# Allegro board GPS_INTERFACE_BOARDv2.brd
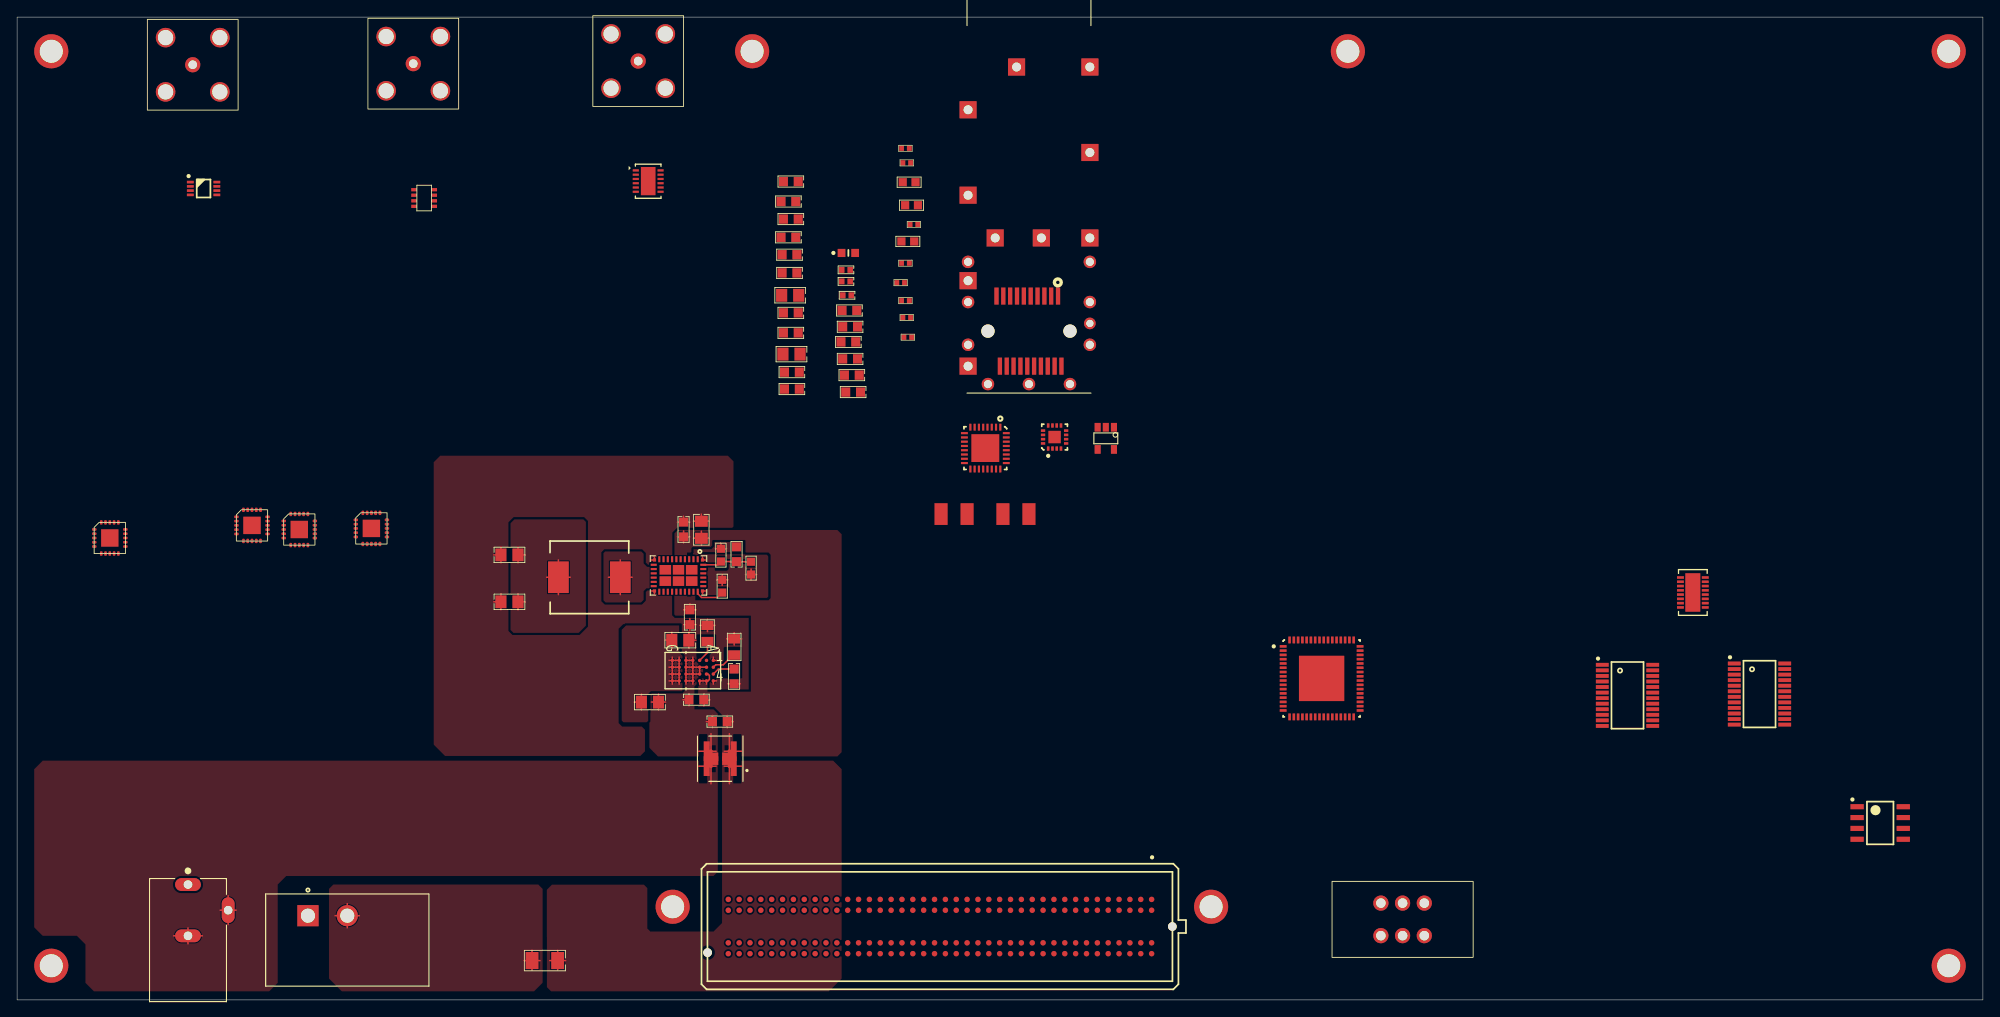
[diagram p0: board, top side]
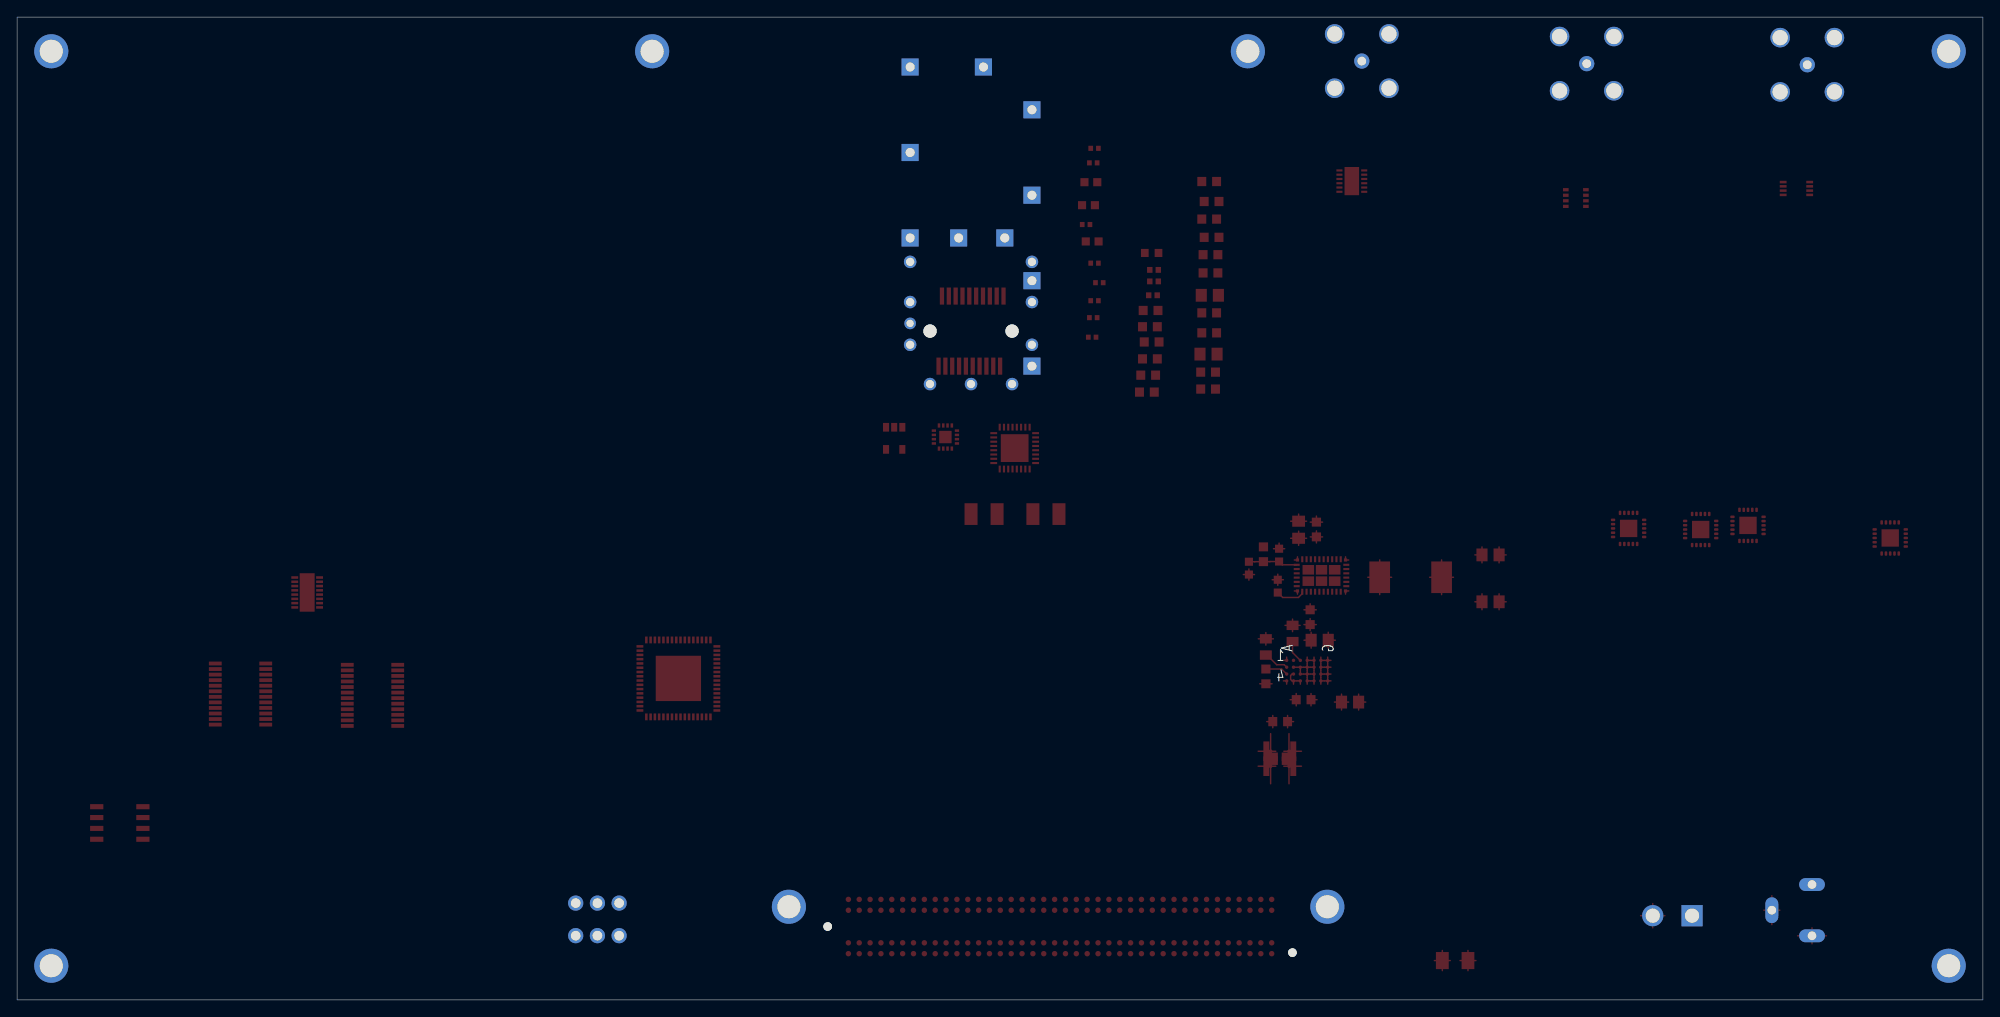
[diagram p1: board, bottom side, seen from below]

Outline 230 x 115 mm; copper layers: TOP, L2, L3, L4, L5, BOTTOM. Coordinates in mm from the lower left corner of the outline.
Outline path: 0,115 230,115 230,0 0,0 0,115

## Design rules (mm)
constraint set DEFAULT: min track width 0.17, pair gap 0.3
net group CLK_TO_SFP[0..11]: nets CLK_TO_SFP.CLK_TO_SFP_N0 CLK_TO_SFP.CLK_TO_SFP_N1 CLK_TO_SFP.CLK_TO_SFP_N2 CLK_TO_SFP.CLK_TO_SFP_N3 CLK_TO_SFP.CLK_TO_SFP_N4 CLK_TO_SFP.CLK_TO_SFP_N5 CLK_TO_SFP.CLK_TO_SFP_P0 CLK_TO_SFP.CLK_TO_SFP_P1 CLK_TO_SFP.CLK_TO_SFP_P2 CLK_TO_SFP.CLK_TO_SFP_P3 CLK_TO_SFP.CLK_TO_SFP_P4 CLK_TO_SFP.CLK_TO_SFP_P5
net group FMC[0..60]: nets FMC.CLK_FILTER_A FMC.CLK_FILTER_B FMC.CLK_GEN_INTR* FMC.CLK_GEN_LOL FMC.CLK_GEN_LOL_N FMC.CLK_GEN_RST* FMC.CLK_TO_FPGA_N FMC.CLK_TO_FPGA_P FMC.DATA_TO_FF_N0 FMC.DATA_TO_FF_N1 FMC.DATA_TO_FF_N2 FMC.DATA_TO_FF_N3 FMC.DATA_TO_FF_N4 FMC.DATA_TO_FF_N5 FMC.DATA_TO_FF_P0 FMC.DATA_TO_FF_P1 FMC.DATA_TO_FF_P2 FMC.DATA_TO_FF_P3 FMC.DATA_TO_FF_P4 FMC.DATA_TO_FF_P5 FMC.GPS_CLK_EN* FMC.GPS_IRIGB FMC.GPS_PPS_N FMC.GPS_PPS_P FMC.I2C_BUS_INT0* FMC.I2C_BUS_INT1* FMC.I2C_BUS_RST* FMC.OSC_EN FMC.PWR_GOOD FMC.RECOV_CLK_N0 FMC.RECOV_CLK_N1 FMC.RECOV_CLK_N2 FMC.RECOV_CLK_N3 FMC.RECOV_CLK_N4 FMC.RECOV_CLK_N5 FMC.RECOV_CLK_P0 FMC.RECOV_CLK_P1 FMC.RECOV_CLK_P2 FMC.RECOV_CLK_P3 FMC.RECOV_CLK_P4 FMC.RECOV_CLK_P5 FMC.RECOV_DATA_N0 FMC.RECOV_DATA_N1 FMC.RECOV_DATA_N2 FMC.RECOV_DATA_N3 FMC.RECOV_DATA_N4 FMC.RECOV_DATA_N5 FMC.RECOV_DATA_P0 FMC.RECOV_DATA_P1 FMC.RECOV_DATA_P2 FMC.RECOV_DATA_P3 FMC.RECOV_DATA_P4 FMC.RECOV_DATA_P5 FMC.SCL FMC.SDA FMC.SFP_TX_DISABLE0 FMC.SFP_TX_DISABLE1 FMC.SFP_TX_DISABLE2 FMC.SFP_TX_DISABLE3 FMC.SFP_TX_DISABLE4 FMC.SFP_TX_DISABLE5
net group GPS_GROUP[0..4]: nets GPS_GROUP.GPS_CLK_N GPS_GROUP.GPS_CLK_P GPS_GROUP.GPS_IRIGB GPS_GROUP.GPS_PPS_N GPS_GROUP.GPS_PPS_P
net group VM1: nets GND_SIGNAL

## Placement (name value [footprint] x y rotation side)
C44  0.1UF  [CAP0603]  83.89 37.85 90 top
C46  1UF  [CAP0603]  82.22 32.56 180 top
C47  1UF  [CAP0603]  79.48 35.13 180 top
C48  22UF  [CAP0805]  77.6 42.09 0 top
C49  0.1UF  [CAP0805]  74.04 34.85 0 top
C50  10UF  [CAP0805]  80.06 55.02 90 top
C51  0.47UF  [CAP0603]  78.71 44.78 270 top
C52  0.47UF  [CAP0603]  77.98 55.04 90 top
C53  47UF  [CAP0805]  57.61 52.07 180 top
C54  47UF  [CAP0805]  57.61 46.58 180 top
C55  5.0PF  [CAP0603]  84.18 52.15 270 top
C101  0.1UF  [CAP0603]  90.65 71.48 0 top
C102  0.1UF  [CAP0603]  90.65 73.46 0 top
C103  22UF  [CAP0805]  90.6 75.56 0 top
C104  0.1UF  [CAP0603]  90.53 78.05 0 top
C105  0.1UF  [CAP0603]  90.53 80.39 0 top
C106  22UF  [CAP0805]  90.45 82.45 0 top
C107  0.1UF  [CAP0603]  90.37 85.06 0 top
C108  1000PF  [CAP0603]  90.37 87.2 0 top
C109  0.1UF  [CAP0603]  90.25 89.23 0 top
C110  0.1UF  [CAP0603]  90.53 91.36 0 top
C111  0.1UF  [CAP0603]  90.25 93.42 0 top
C112  0.1UF  [CAP0603]  90.53 95.76 0 top
C113  0.1UF  [CAP0603]  97.82 71.12 0 top
C114  1000PF  [CAP0603]  97.66 73.1 0 top
C115  1000PF  [CAP0603]  97.46 75.01 0 top
C116  1000PF  [CAP0603]  97.26 76.99 0 top
C117  1000PF  [CAP0603]  97.46 78.77 0 top
C118  1000PF  [CAP0603]  97.38 80.67 0 top
C119  0.47UF  [CAP0402]  97.1 82.45 0 top
C120  0.1UF  [CAP0402]  96.98 84.07 0 top
C121  0.1UF  [CAP0402]  96.98 85.42 0 top
D6  RED  [LEDC1608X80N]  97.26 87.4 0 top
F1  4A  [CAP1206]  61.75 4.6 0 top
FL1  120 Ohm@100MHz  [FIL_DLW5BTM501SQ2L]  82.26 28.22 270 top
IC1  SN74AVC2T45DCTR  [SOP50P310X90-8N]  21.82 94.95 0 top
IC2  SI5395A-A-GM  [QFN50P900X900X90-65N-S530]  152.63 37.62 0 top
IC3  24AA025E48T-I/OT  [SOIC127P600X175-8N]  217.98 20.7 0 top
IC4  PCA9539PW,118  [SOP65P640X110-24N]  203.86 35.79 0 top
IC5  PCA9539PW,118  [SOP65P640X110-24N]  188.42 35.64 0 top
J1  BNC/R  [BNC_RA_03161221]  72.67 109.86 0 top
J2  BNC/R  [BNC_RA_03161221]  46.35 109.55 0 top
J3  BNC/R  [BNC_RA_03161221]  20.55 109.42 0 top
J4  AXS-7050-06-13  [OSC_6P_7_5_1-6]  162.1 9.42 0 top
J5  PJ-102AH  [CUI_PJ-102AH]  19.99 7 270 top
J6  ASP-134606-01  [SAMTEC_ASP-134606-01]  107.98 8.59 0 top
J7  1367073-1  [TE_2227023-1]  118.39 78.26 270 top
L7  3.3 uH  [WE-LHMI_8040]  66.95 49.45 180 top
L8  4.7 uH  [CAP1210]  116.87 56.85 0 top
L9  4.7 uH  [CAP1210]  109.63 56.85 0 top
NOREF  -  [unnamed]  155.7 111 0 top
NOREF#2  -  [unnamed]  226 111 0 top
NOREF#3  -  [unnamed]  139.7 10.9 0 top
NOREF#4  -  [unnamed]  86 111 0 top
NOREF#5  -  [unnamed]  4 111 0 top
NOREF#6  -  [unnamed]  226 4 0 top
NOREF#7  -  [unnamed]  76.7 10.9 0 top
NOREF#8  -  [unnamed]  4 4 0 top
R29  33.2 kOhm  [RES0805]  80.77 42.88 270 top
R30  45.3k  [RES0805]  83.9 41.3 90 top
R31  1M  [RES0603]  82.35 52.04 270 top
R32  17.8k  [RES0603]  82.5 48.41 90 top
R33  383k  [RES0603]  85.88 50.52 270 top
R66  49.9  [RES0402]  104.22 77.55 0 top
R67  49.9  [RES0402]  104.09 79.83 0 top
R68  4.7k  [RES0402]  103.94 81.81 0 top
R69  4.7k  [RES0402]  103.38 83.92 0 top
R70  4.7k  [RES0402]  103.94 86.21 0 top
R71  4.99K  [RES0603]  104.22 88.75 0 top
R72  4.7k  [RES0402]  104.93 90.73 0 top
R73  4.99K  [RES0603]  104.65 92.99 0 top
R74  200  [RES0603]  104.37 95.68 0 top
R75  0  [RES0402]  104.09 97.94 0 top
R76  0  [RES0402]  103.94 99.64 0 top
S1  L101011MS02Q  [SW_L101011MS02Q]  38.63 7.01 0 top
U1  LTC6957IDD-2#PBF  [DFN_12]  73.84 95.81 0 top
U2  MAX9371EKA+  [SOT-23-8]  47.62 93.83 0 top
U4  LTM8063EY#PBF  [BGA28]  79.06 38.53 270 top
U5  LT8645SJV-2  [CONV_T8645SIV]  77.38 49.66 270 top
U6  TPS7A8400RGRT  [QFN20_3P65MMSQ]  10.85 54.05 0 top
U8  TPS7A8400RGRT  [QFN20_3P65MMSQ]  41.45 55.17 0 top
U10  TPS7A8400RGRT  [QFN20_3P65MMSQ]  33.02 55.04 0 top
U11  TPS7A8400RGRT  [QFN20_3P65MMSQ]  27.48 55.52 0 top
U16  NB7V52MMNG  [PQFN50P300X300X100-17N-S145]  121.39 65.86 90 top
U17  ADN2814ACPZ  [QFN50P500X500X100-33N-S325]  113.28 64.57 270 top
U18  SN74LVC1G32  [SOT23-5]  127.38 65.71 270 top
U34  LTC4317CDHC#PBF  [DFN-16_DHC]  196.06 47.68 0 top

## Library data of the parts
C44 C46-C55 = CAP_NP: Tolerance: TOL?; User Part Number: PN?
C101-C121 = CAP_NP: Tolerance: TOL?; User Part Number: PN?; room: SFP1
D6 = LED: room: SFP1
F1 = FUSE: Tolerance: TOL?; User Part Number: PN?
FL1 = 490-11112-1-ND
IC1 = 74AVC2T45_DCT_0
IC2 = SI5395_QFN_1
IC3 = 24AA025E48_SOIC_0
IC4 IC5 = PCA9539_TSSOP_0
J1-J3 = BNCR_3
J4 = OSC_SOCKET_3
J5 = PJ-102AH
J6 = CON160P_10
J7 = CON20P_SFP-1367073-1_1: room: SFP1
L7 = IND
L8 L9 = IND: room: SFP1
R29-R33 = R: Tolerance: TOL?; User Part Number: PN?
R66-R76 = R: Tolerance: TOL?; User Part Number: PN?; room: SFP1
S1 = L101011MS02Q
U1 = LTC6957-2_3
U2 = MAX9371_2
U4 = LTM8063_0: User Part Number: PN; Tolerance: TOL
U5 = LT8645
U6 U8 U10 U11 = TPS7A8400
U16 = NB7V52M_2: room: SFP1
U17 = ADN2814ACPZ_1: room: SFP1
U18 = SN74LVC1G32_4: room: SFP1
U34 = LTC4317CDHC_0: User Part Number: PN; Tolerance: TOL

## Footprints (pads in the part's own frame, mm; a bottom-side part is the same pattern mirrored in y, then rotated)
BGA28
  round 0.4 smd: A1(-1.2,2.4) A2(-0.4,2.4) A3(0.4,2.4) A4(1.2,2.4) B1(-1.2,1.6) B2(-0.4,1.6) B3(0.4,1.6) B4(1.2,1.6) C1(-1.2,0.8) C2(-0.4,0.8) C3(0.4,0.8) C4(1.2,0.8) D1(-1.2,0) D2(-0.4,0) D3(0.4,0) D4(1.2,0) E1(-1.2,-0.8) E2(-0.4,-0.8) E3(0.4,-0.8) E4(1.2,-0.8) F1(-1.2,-1.6) F2(-0.4,-1.6) F3(0.4,-1.6) F4(1.2,-1.6) G1(-1.2,-2.4) G2(-0.4,-2.4) G3(0.4,-2.4) G4(1.2,-2.4)
BNC_RA_03161221
  round 1.778 hole 1.016: 1(0,0)
  round 2.286 hole 1.778: 2(3.175,3.175) 3(3.175,-3.175) 4(-3.175,-3.175) 5(-3.175,3.175)
CAP0402
  rect 0.635x0.686 smd: 1(-0.499,0) 2(0.499,0)
CAP0603
  rect 1.05x1.08 smd: 1(-0.865,0) 2(0.865,0)
CAP0805
  rect 1.3x1.5 smd: 1(-1,0) 2(1,0)
CAP1206
  rect 1.5x2 smd: 1(-1.5,0) 2(1.5,0)
CAP1210
  rect 1.524x2.54 smd: 1(-1.524,0) 2(1.524,0)
CONV_T8645SIV
  rect 0.7x0.25 smd: 1(-1.9,2.25) 2(-1.9,1.75) 3(-1.9,1.25) 4(-1.9,0.75) 5(-1.9,0.25) 6(-1.9,-0.25) 7(-1.9,-0.75) 8(-1.9,-1.25) 9(-1.9,-1.75) 10(-1.9,-2.25) 17(1.9,-2.25) 18(1.9,-1.75) 19(1.9,-1.25) 20(1.9,-0.75) 21(1.9,-0.25) 22(1.9,0.25) 23(1.9,0.75) 24(1.9,1.25) 25(1.9,1.75) 26(1.9,2.25)
  rect 0.25x0.7 smd: 11(-1.25,-2.9) 12(-0.75,-2.9) 13(-0.25,-2.9) 14(0.25,-2.9) 15(0.75,-2.9) 16(1.25,-2.9) 27(1.25,2.9) 28(0.75,2.9) 29(0.25,2.9) 30(-0.25,2.9) 31(-0.75,2.9) 32(-1.25,2.9)
  rect 1.125x1.355 smd: 33(-0.662,1.543) 34(0.662,1.543) 37(-0.662,-1.543) 38(0.662,-1.543)
  rect 1.125x1.33 smd: 35(-0.662,0) 36(0.662,0)
  rect 0.375x0.375 smd: 39(-1.813,2.813) 40(-1.813,-2.813) 41(1.813,-2.813) 42(1.813,2.813)
CUI_PJ-102AH
  oval 1.508x3.016 hole 1: 1(-6.5,0) 2(-0.5,0)
  oval 3.016x1.508 hole 1: 3(-3.5,4.7)
DFN-16_DHC
  rect 0.805x0.3 smd: 1(-1.452,1.75) 2(-1.452,1.25) 3(-1.452,0.75) 4(-1.452,0.25) 5(-1.452,-0.25) 6(-1.452,-0.75) 7(-1.452,-1.25) 8(-1.452,-1.75) 9(1.452,-1.75) 10(1.452,-1.25) 11(1.452,-0.75) 12(1.452,-0.25) 13(1.452,0.25) 14(1.452,0.75) 15(1.452,1.25) 16(1.452,1.75)
  rect 1.75x4.5 smd: 17(0,0)
DFN_12
  rect 0.711x0.254 smd: 1(-1.45,1.25) 2(-1.45,0.75) 3(-1.45,0.25) 4(-1.45,-0.25) 5(-1.45,-0.75) 6(-1.45,-1.25) 7(1.45,-1.25) 8(1.45,-0.75) 9(1.45,-0.25) 10(1.45,0.25) 11(1.45,0.75) 12(1.45,1.25)
  rect 1.702x3.302 smd: 13(0,0)
FIL_DLW5BTM501SQ2L
  custom 2.3x1.7 smd: 1(0.875,1.075) 2(-0.875,1.075) 3(-0.875,-1.075) 4(0.875,-1.075)
LEDC1608X80N
  rect 0.9x0.95 smd: 1(-0.8,0) 2(0.8,0)
OSC_6P_7_5_1-6
  round 1.778 hole 1.118: 1(-2.54,-1.905) 2(0,-1.905) 3(2.54,-1.905) 4(2.54,1.905) 5(0,1.905) 6(-2.54,1.905)
PQFN50P300X300X100-17N-S145
  rect 0.5x0.3 smd: 1(-1.35,0.75) 2(-1.35,0.25) 3(-1.35,-0.25) 4(-1.35,-0.75) 9(1.35,-0.75) 10(1.35,-0.25) 11(1.35,0.25) 12(1.35,0.75)
  rect 0.3x0.5 smd: 5(-0.75,-1.35) 6(-0.25,-1.35) 7(0.25,-1.35) 8(0.75,-1.35) 13(0.75,1.35) 14(0.25,1.35) 15(-0.25,1.35) 16(-0.75,1.35)
  rect 1.45x1.45 smd: 17(0,0)
QFN20_3P65MMSQ
  rrect 0.51x0.305 smd: 1(-1.82,1) 2(-1.82,0.5) 3(-1.82,0) 4(-1.82,-0.5) 5(-1.82,-1) 11(1.82,-1) 12(1.82,-0.5) 13(1.82,0) 14(1.82,0.5) 15(1.82,1)
  rrect 0.305x0.51 smd: 6(-1,-1.82) 7(-0.5,-1.82) 8(0,-1.82) 9(0.5,-1.82) 10(1,-1.82) 16(1,1.82) 17(0.5,1.82) 18(0,1.82) 19(-0.5,1.82) 20(-1,1.82)
  rect 2.032x2.032 smd: 21(0,0)
QFN50P500X500X100-33N-S325
  rect 0.8x0.25 smd: 1(-2.45,1.75) 2(-2.45,1.25) 3(-2.45,0.75) 4(-2.45,0.25) 5(-2.45,-0.25) 6(-2.45,-0.75) 7(-2.45,-1.25) 8(-2.45,-1.75) 17(2.45,-1.75) 18(2.45,-1.25) 19(2.45,-0.75) 20(2.45,-0.25) 21(2.45,0.25) 22(2.45,0.75) 23(2.45,1.25) 24(2.45,1.75)
  rect 0.25x0.8 smd: 9(-1.75,-2.45) 10(-1.25,-2.45) 11(-0.75,-2.45) 12(-0.25,-2.45) 13(0.25,-2.45) 14(0.75,-2.45) 15(1.25,-2.45) 16(1.75,-2.45) 25(1.75,2.45) 26(1.25,2.45) 27(0.75,2.45) 28(0.25,2.45) 29(-0.25,2.45) 30(-0.75,2.45) 31(-1.25,2.45) 32(-1.75,2.45)
  rect 3.25x3.25 smd: 33(0,0)
QFN50P900X900X90-65N-S530
  rect 0.8x0.3 smd: 1(-4.5,3.75) 2(-4.5,3.25) 3(-4.5,2.75) 4(-4.5,2.25) 5(-4.5,1.75) 6(-4.5,1.25) 7(-4.5,0.75) 8(-4.5,0.25) 9(-4.5,-0.25) 10(-4.5,-0.75) 11(-4.5,-1.25) 12(-4.5,-1.75) 13(-4.5,-2.25) 14(-4.5,-2.75) 15(-4.5,-3.25) 16(-4.5,-3.75) 33(4.5,-3.75) 34(4.5,-3.25) 35(4.5,-2.75) 36(4.5,-2.25) 37(4.5,-1.75) 38(4.5,-1.25) 39(4.5,-0.75) 40(4.5,-0.25) 41(4.5,0.25) 42(4.5,0.75) 43(4.5,1.25) 44(4.5,1.75) 45(4.5,2.25) 46(4.5,2.75) 47(4.5,3.25) 48(4.5,3.75)
  rect 0.3x0.8 smd: 17(-3.75,-4.5) 18(-3.25,-4.5) 19(-2.75,-4.5) 20(-2.25,-4.5) 21(-1.75,-4.5) 22(-1.25,-4.5) 23(-0.75,-4.5) 24(-0.25,-4.5) 25(0.25,-4.5) 26(0.75,-4.5) 27(1.25,-4.5) 28(1.75,-4.5) 29(2.25,-4.5) 30(2.75,-4.5) 31(3.25,-4.5) 32(3.75,-4.5) 49(3.75,4.5) 50(3.25,4.5) 51(2.75,4.5) 52(2.25,4.5) 53(1.75,4.5) 54(1.25,4.5) 55(0.75,4.5) 56(0.25,4.5) 57(-0.25,4.5) 58(-0.75,4.5) 59(-1.25,4.5) 60(-1.75,4.5) 61(-2.25,4.5) 62(-2.75,4.5) 63(-3.25,4.5) 64(-3.75,4.5)
  rect 5.3x5.3 smd: 65(0,0)
RES0402
  rect 0.55x0.6 smd: 1(-0.45,0) 2(0.45,0)
RES0603
  rect 0.95x0.95 smd: 1(-0.75,0) 2(0.75,0)
RES0805
  rect 1.1x1.4 smd: 1(-0.95,0) 2(0.95,0)
SAMTEC_ASP-134606-01
  round 1.001 hole 1.3 unplated: (-27.19,-3.05) (27.19,0)
  round 0.64 smd: C1(24.765,3.175) C2(23.495,3.175) C3(22.225,3.175) C4(20.955,3.175) C5(19.685,3.175) C6(18.415,3.175) C7(17.145,3.175) C8(15.875,3.175) C9(14.605,3.175) C10(13.335,3.175) C11(12.065,3.175) C12(10.795,3.175) C13(9.525,3.175) C14(8.255,3.175) C15(6.985,3.175) C16(5.715,3.175) C17(4.445,3.175) C18(3.175,3.175) C19(1.905,3.175) C20(0.635,3.175) C21(-0.635,3.175) C22(-1.905,3.175) C23(-3.175,3.175) C24(-4.445,3.175) C25(-5.715,3.175) C26(-6.985,3.175) C27(-8.255,3.175) C28(-9.525,3.175) C29(-10.795,3.175) C30(-12.065,3.175) C31(-13.335,3.175) C32(-14.605,3.175) C33(-15.875,3.175) C34(-17.145,3.175) C35(-18.415,3.175) C36(-19.685,3.175) C37(-20.955,3.175) C38(-22.225,3.175) C39(-23.495,3.175) C40(-24.765,3.175) D1(24.765,1.905) D2(23.495,1.905) D3(22.225,1.905) D4(20.955,1.905) D5(19.685,1.905) D6(18.415,1.905) D7(17.145,1.905) D8(15.875,1.905) D9(14.605,1.905) D10(13.335,1.905) D11(12.065,1.905) D12(10.795,1.905) D13(9.525,1.905) D14(8.255,1.905) D15(6.985,1.905) D16(5.715,1.905) D17(4.445,1.905) D18(3.175,1.905) D19(1.905,1.905) D20(0.635,1.905) D21(-0.635,1.905) D22(-1.905,1.905) D23(-3.175,1.905) D24(-4.445,1.905) D25(-5.715,1.905) D26(-6.985,1.905) D27(-8.255,1.905) D28(-9.525,1.905) D29(-10.795,1.905) D30(-12.065,1.905) D31(-13.335,1.905) D32(-14.605,1.905) D33(-15.875,1.905) D34(-17.145,1.905) D35(-18.415,1.905) D36(-19.685,1.905) D37(-20.955,1.905) D38(-22.225,1.905) D39(-23.495,1.905) D40(-24.765,1.905) G1(24.765,-1.905) G2(23.495,-1.905) G3(22.225,-1.905) G4(20.955,-1.905) G5(19.685,-1.905) G6(18.415,-1.905) G7(17.145,-1.905) G8(15.875,-1.905) G9(14.605,-1.905) G10(13.335,-1.905) G11(12.065,-1.905) G12(10.795,-1.905) G13(9.525,-1.905) G14(8.255,-1.905) G15(6.985,-1.905) G16(5.715,-1.905) G17(4.445,-1.905) G18(3.175,-1.905) G19(1.905,-1.905) G20(0.635,-1.905) G21(-0.635,-1.905) G22(-1.905,-1.905) G23(-3.175,-1.905) G24(-4.445,-1.905) G25(-5.715,-1.905) G26(-6.985,-1.905) G27(-8.255,-1.905) G28(-9.525,-1.905) G29(-10.795,-1.905) G30(-12.065,-1.905) G31(-13.335,-1.905) G32(-14.605,-1.905) G33(-15.875,-1.905) G34(-17.145,-1.905) G35(-18.415,-1.905) G36(-19.685,-1.905) G37(-20.955,-1.905) G38(-22.225,-1.905) G39(-23.495,-1.905) G40(-24.765,-1.905) H1(24.765,-3.175) H2(23.495,-3.175) H3(22.225,-3.175) H4(20.955,-3.175) H5(19.685,-3.175) H6(18.415,-3.175) H7(17.145,-3.175) H8(15.875,-3.175) H9(14.605,-3.175) H10(13.335,-3.175) H11(12.065,-3.175) H12(10.795,-3.175) H13(9.525,-3.175) H14(8.255,-3.175) H15(6.985,-3.175) H16(5.715,-3.175) H17(4.445,-3.175) H18(3.175,-3.175) H19(1.905,-3.175) H20(0.635,-3.175) H21(-0.635,-3.175) H22(-1.905,-3.175) H23(-3.175,-3.175) H24(-4.445,-3.175) H25(-5.715,-3.175) H26(-6.985,-3.175) H27(-8.255,-3.175) H28(-9.525,-3.175) H29(-10.795,-3.175) H30(-12.065,-3.175) H31(-13.335,-3.175) H32(-14.605,-3.175) H33(-15.875,-3.175) H34(-17.145,-3.175) H35(-18.415,-3.175) H36(-19.685,-3.175) H37(-20.955,-3.175) H38(-22.225,-3.175) H39(-23.495,-3.175) H40(-24.765,-3.175)
SOIC127P600X175-8N
  rect 1.55x0.6 smd: 1(-2.7,1.905) 2(-2.7,0.635) 3(-2.7,-0.635) 4(-2.7,-1.905) 5(2.7,-1.905) 6(2.7,-0.635) 7(2.7,0.635) 8(2.7,1.905)
SOP50P310X90-8N
  rect 0.8x0.3 smd: 1(-1.55,0.75) 2(-1.55,0.25) 3(-1.55,-0.25) 4(-1.55,-0.75) 5(1.55,-0.75) 6(1.55,-0.25) 7(1.55,0.25) 8(1.55,0.75)
SOP65P640X110-24N
  rect 1.5x0.45 smd: 1(-2.95,3.575) 2(-2.95,2.925) 3(-2.95,2.275) 4(-2.95,1.625) 5(-2.95,0.975) 6(-2.95,0.325) 7(-2.95,-0.325) 8(-2.95,-0.975) 9(-2.95,-1.625) 10(-2.95,-2.275) 11(-2.95,-2.925) 12(-2.95,-3.575) 13(2.95,-3.575) 14(2.95,-2.925) 15(2.95,-2.275) 16(2.95,-1.625) 17(2.95,-0.975) 18(2.95,-0.325) 19(2.95,0.325) 20(2.95,0.975) 21(2.95,1.625) 22(2.95,2.275) 23(2.95,2.925) 24(2.95,3.575)
SOT23-5
  rect 1.016x0.711 smd: 1(-1.295,0.953) 2(-1.295,0) 3(-1.295,-0.953) 4(1.295,-0.953) 5(1.295,0.953)
SOT-23-8
  rect 0.66x0.381 smd: 1(-1.175,0.975) 2(-1.175,0.325) 3(-1.175,-0.325) 4(-1.175,-0.975) 5(1.175,-0.975) 6(1.175,-0.325) 7(1.175,0.325) 8(1.175,0.975)
SW_L101011MS02Q
  rect 2.48x2.48 hole 1.65: 1(-4.6,2.85)
  round 2.48 hole 1.65: 2(0,2.85)
TE_2227023-1
  round 1.55 hole 1.55 unplated: (0,4.8) (0,-4.8)
  rect 2x0.5 smd: 1(-4.1,3.4) 2(-4.1,2.6) 3(-4.1,1.8) 4(-4.1,1) 5(-4.1,0.2) 6(-4.1,-0.6) 7(-4.1,-1.4) 8(-4.1,-2.2) 9(-4.1,-3) 10(-4.1,-3.8) 11(4.1,-3.4) 12(4.1,-2.6) 13(4.1,-1.8) 14(4.1,-1) 15(4.1,-0.2) 16(4.1,0.6) 17(4.1,1.4) 18(4.1,2.2) 19(4.1,3) 20(4.1,3.8)
  round 1.358 hole 0.85: S1(-0.9,7.125)
  round 1.458 hole 0.95: S2(1.6,7.125) S3(-3.4,7.125) S4(-8.1,7.125) S5(6.2,4.8) S6(6.2,0) S7(6.2,-4.8) S8(1.6,-7.125) S9(-3.4,-7.125) S10(-8.1,-7.125)
  rect 2x2 hole 1.05: S11(-10.9,7.125) S12(-20.9,7.125) S13(-30.9,7.125) S14(-10.9,1.45) S15(-30.9,-1.45) S16(-10.9,-3.95) S17(-25.9,-7.125) S18(-15.9,-7.125) S19(-5.9,-7.125) S20(4.1,-7.125)
unnamed
  round 3.988 hole 2.692: 1(0,0)
WE-LHMI_8040
  rect 2.42x3.7 smd: 1(-3.62,0) 2(3.62,0)

## Nets
12V_CONN: J5.1 S1.1
12V_FUSE: F1.2 FL1.1
12V_SW: F1.1 S1.2
GND_IN: FL1.4 J5.2 J5.3
GND_POWER: C44.1 C46.2 C47.2 C48.2 C49.2 C50.2 C51.2 C52.2 C53.2 C54.2 FL1.3 IC1.3 IC1.4 IC2.65 J1.2 J1.3 J1.4 J1.5 J2.2 J2.3 J2.4 J2.5 J3.2 J3.3 J3.4 J3.5 J4.3 J6.C1 J6.C4 J6.C5 J6.C9 J6.C12 J6.C13 J6.C16 J6.C17 J6.C20 J6.C21 J6.C24 J6.C25 J6.C28 J6.C29 J6.C32 J6.C33 J6.C34 J6.C36 J6.C38 J6.C40 J6.D2 J6.D3 J6.D6 J6.D7 J6.D10 J6.D13 J6.D16 J6.D19 J6.D22 J6.D25 J6.D28 J6.D34 J6.D37 J6.D39 J6.G1 J6.G4 J6.G5 J6.G8 J6.G11 J6.G14 J6.G17 J6.G20 J6.G23 J6.G26 J6.G29 J6.G32 J6.G35 J6.G38 J6.G40 J6.H3 J6.H6 J6.H9 J6.H12 J6.H15 J6.H18 J6.H21 J6.H24 J6.H27 J6.H30 J6.H33 J6.H36 J6.H39 R29.1 R30.2 R32.2 R33.2 U1.5 U1.13 U2.2 U4.A1 U4.A4 U4.B2 U4.C2 U4.C3 U4.D1 U4.D2 U4.D3 U4.D4 U4.E1 U4.E2 U4.E3 U4.E4 U5.3 U5.7 U5.8 U5.9 U5.10 U5.17 U5.18 U5.19 U5.20 U5.24 U5.30 U5.33 U5.34 U5.35 U5.36 U5.37 U5.38 U5.39 U5.40 U5.41 U5.42 U6.8 U6.18 U6.21 U8.6 U8.8 U8.10 U8.11 U8.18 U8.21 U10.6 U10.8 U10.10 U10.11 U10.18 U10.21 U11.7 U11.8 U11.10 U11.18 U11.21
GND_SIGNAL: C101.2 C102.2 C103.1 C104.1 C105.1 C106.1 C107.2 C108.2 C109.1 C110.1 C111.1 C112.1 C113.1 C114.2 C115.2 C116.2 C117.2 C118.2 C120.1 C121.2 IC3.4(VSS) IC4.12 IC5.12 J7.1 J7.9 J7.10 J7.11 J7.14 J7.17 J7.20(VEET2) J7.S1 J7.S2 J7.S3 J7.S4 J7.S5 J7.S6 J7.S7 J7.S8 J7.S9 J7.S10 J7.S11 J7.S12 J7.S13 J7.S14 J7.S15 J7.S16 J7.S17 J7.S18 J7.S19 J7.S20 R71.1 R74.2 R75.1 R76.2 U16.9 U16.17 U17.6 U17.7 U17.8 U17.11 U17.13 U17.17 U17.23 U17.30 U17.33 U18.3 U34.1 U34.3 U34.5 U34.17
VCC3V3: C101.1 C102.1 C109.2 C110.2 C111.2 C112.2 C113.2 C114.1 C115.1 C116.1 C117.1 C118.1 IC1.8(VCCB) IC3.8 IC4.24(VDD) IC5.24(VDD) L8.1 L9.1 R68.1 R69.1 R70.1 R72.1 U17.1 U17.2 U17.10 U17.12 U17.18 U17.24 U17.31 U17.32 U18.5 U34.7
VCC3V3_LFILT: U1.2(VCC)
VCC5V: IC1.1 IC1.5
VCC5V_LFILT: U2.1(VCC)
VCC_1V8: C107.1 C108.1 R66.1 R67.1 R73.1 U16.12
VCCR_SFP INTERFACE_SFP1: C103.2 C104.2 J7.15 L8.2
VCCT_SFP INTERFACE_SFP1: C105.2 C106.2 J7.16 L9.2
VDD_FILT: IC2.32 IC2.46 IC2.60
VDDA_FILT: IC2.13
VDDO8: IC2.52
VDDO9: IC2.57
VDDO_FILT: IC2.22 IC2.26 IC2.29 IC2.33 IC2.36 IC2.40 IC2.43 IC2.49
A0_1: IC4.21
A0_2: IC5.21
A0_BID: IC3.1
A1_1: IC4.2
A1_2: IC5.2
A1_BID: IC3.2
A2_BID: IC3.3
CLK_FDBACK_N: IC2.62
CLK_FDBACK_P: IC2.61
CLK_TO_SFP.CLK_TO_SFP_N0: IC2.23 U16.7
CLK_TO_SFP.CLK_TO_SFP_N1: IC2.27
CLK_TO_SFP.CLK_TO_SFP_N2: IC2.30
CLK_TO_SFP.CLK_TO_SFP_N3: IC2.34
CLK_TO_SFP.CLK_TO_SFP_N4: IC2.37
CLK_TO_SFP.CLK_TO_SFP_N5: IC2.41
CLK_TO_SFP.CLK_TO_SFP_P0: IC2.24 U16.6
CLK_TO_SFP.CLK_TO_SFP_P1: IC2.28
CLK_TO_SFP.CLK_TO_SFP_P2: IC2.31
CLK_TO_SFP.CLK_TO_SFP_P3: IC2.35
CLK_TO_SFP.CLK_TO_SFP_P4: IC2.38
CLK_TO_SFP.CLK_TO_SFP_P5: IC2.42
EXT_CLK50_N: IC2.8
EXT_CLK50_P: IC2.9(XB)
FB_1V8: U11.3
FB_3V3_1: U8.3
FB_3V3_2: U10.3
FB_3V5: C55.2 R31.2 R33.1 U5.32
FB_5V: U6.3
FB_5V5: R30.1 U4.A2
FMC.CLK_FILTER_A: J6.C14 U1.1
FMC.CLK_FILTER_B: J6.C15 U1.6
FMC.CLK_GEN_INTR*: IC2.12 J6.C27
FMC.CLK_GEN_LOL: IC2.47 J6.C26
FMC.CLK_GEN_LOL_N: J6.C10
FMC.CLK_GEN_RST*: IC2.6 J6.C19
FMC.CLK_TO_FPGA_N: IC2.44 J6.G3
FMC.CLK_TO_FPGA_P: IC2.45 J6.G2
FMC.DATA_TO_FF_N0: J6.H8 U16.3
FMC.DATA_TO_FF_N1: J6.H11
FMC.DATA_TO_FF_N2: J6.H14
FMC.DATA_TO_FF_N3: J6.H17
FMC.DATA_TO_FF_N4: J6.H20
FMC.DATA_TO_FF_N5: J6.H23
FMC.DATA_TO_FF_P0: J6.H7 U16.2
FMC.DATA_TO_FF_P1: J6.H10
FMC.DATA_TO_FF_P2: J6.H13
FMC.DATA_TO_FF_P3: J6.H16
FMC.DATA_TO_FF_P4: J6.H19
FMC.DATA_TO_FF_P5: J6.H22
FMC.GPS_CLK_EN*: J6.C11 U1.12
FMC.GPS_IRIGB: J6.D11
FMC.GPS_PPS_N: J6.H5
FMC.GPS_PPS_P: J6.H4
FMC.I2C_BUS_INT0*: IC4.1 J6.D14
FMC.I2C_BUS_INT1*: IC5.1 J6.D15
FMC.I2C_BUS_RST*: IC4.3 IC5.3 J6.D12
FMC.OSC_EN: J4.1 J6.C18
FMC.PWR_GOOD: J6.D1
FMC.RECOV_CLK_N0: J6.G10 U17.25
FMC.RECOV_CLK_N1: J6.G13
FMC.RECOV_CLK_N2: J6.G16
FMC.RECOV_CLK_N3: J6.G19
FMC.RECOV_CLK_N4: J6.G22
FMC.RECOV_CLK_N5: J6.G25
FMC.RECOV_CLK_P0: J6.G9 U17.26
FMC.RECOV_CLK_P1: J6.G12
FMC.RECOV_CLK_P2: J6.G15
FMC.RECOV_CLK_P3: J6.G18
FMC.RECOV_CLK_P4: J6.G21
FMC.RECOV_CLK_P5: J6.G24
FMC.RECOV_DATA_N0: J6.H26 U17.28
FMC.RECOV_DATA_N1: J6.H29
FMC.RECOV_DATA_N2: J6.H32
FMC.RECOV_DATA_N3: J6.H35
FMC.RECOV_DATA_N4: J6.H38
FMC.RECOV_DATA_N5: J6.G37
FMC.RECOV_DATA_P0: J6.H25 U17.29
FMC.RECOV_DATA_P1: J6.H28
FMC.RECOV_DATA_P2: J6.H31
FMC.RECOV_DATA_P3: J6.H34
FMC.RECOV_DATA_P4: J6.H37
FMC.RECOV_DATA_P5: J6.G36
FMC.SCL: IC2.16 IC3.6 IC4.22 IC5.22 J6.C30 J7.5 U17.20 U34.15
FMC.SDA: IC2.18 IC3.5 IC4.23 IC5.23 J6.C31 J7.4 U17.21 U34.12
FMC.SFP_TX_DISABLE0: J6.G27 J7.3
FMC.SFP_TX_DISABLE1: J6.G28
FMC.SFP_TX_DISABLE2: J6.G30
FMC.SFP_TX_DISABLE3: J6.G31
FMC.SFP_TX_DISABLE4: J6.G33
FMC.SFP_TX_DISABLE5: J6.G34
FPGA_3V3: J6.C39 J6.D32 J6.D36 J6.D38 J6.D40
FPGA_12V: J6.C35 J6.C37
FPGA_IO_3V3: J6.G39(VCC_IO_2) J6.H40
GPS_CLK10_N: IC2.64
GPS_CLK10_P: IC2.63
GPS_CLK_IN: J1.1(SIGNAL)
GPS_GROUP.GPS_CLK_N: U1.10
GPS_GROUP.GPS_CLK_P: U1.11
GPS_GROUP.GPS_IRIGB: IC1.7
GPS_IRIGB_IN: IC1.2 J3.1(SIGNAL)
GPS_PPS_IN: J2.1(SIGNAL) U2.3
I2C_BUS_UNUSED: IC5.13 IC5.14 IC5.15 IC5.16 IC5.17 IC5.18 IC5.19 IC5.20
MOD_ABS_SFP INTERFACE_SFP1: J7.6 R70.2
N01450_SFP INTERFACE_SFP1: C119.1 U17.14
N01454_SFP INTERFACE_SFP1: C119.2 U17.15
N04910_SFP INTERFACE_SFP1: U16.1 U16.4
N04977_SFP INTERFACE_SFP1: U16.5 U16.8
N136737_SFP INTERFACE_SFP1: D6.1(CATHODE) R74.1
N141568_SFP INTERFACE_SFP1: D6.2 U18.4(Y)
OSC_FILT_3V3: J4.6(VCC)
R_N_SFP INTERFACE_SFP1: R73.2 U16.15
R_P_SFP INTERFACE_SFP1: R71.2 U16.14
RDY1: U34.10
RDY2: U34.9
RS_SFP INTERFACE_SFP1: J7.7 R72.2
RT_3V5: R32.1 U5.26
RT_5V5: R29.2 U4.C1
SFP_RD_N_SFP INTERFACE_SFP1: J7.12 U17.4
SFP_RD_P_SFP INTERFACE_SFP1: J7.13 U17.5
SFP_TD_N_SFP INTERFACE_SFP1: J7.19 R67.2 U16.10
SFP_TD_P_SFP INTERFACE_SFP1: J7.18 R66.2 U16.11
SQUELCH_SFP INTERFACE_SFP1: R76.1 U17.27
SS_1V8: U11.13
SS_3V3_1: U8.13
SS_3V3_2: U10.13
SS_5V: U6.13
SS_5V5: C44.2 U4.A3
THRADJ_SFP INTERFACE_SFP1: C120.2 R75.2 U17.9
VP1V8: U11.1 U11.2(SNS) U11.19 U11.20
VP3V5: C53.1 C54.1 C55.1 L7.2 R31.1 U5.1 U8.14 U8.15 U8.16 U8.17 U10.14 U10.15 U10.16 U10.17 U11.14 U11.15 U11.16 U11.17
VP5V: U6.1 U6.2(SNS) U6.19 U6.20
VP5V5: C48.1 C49.1 U4.F1 U4.F2 U4.F3 U4.F4 U4.G1 U4.G2 U4.G3 U4.G4(VOUT8) U6.14 U6.15 U6.16 U6.17
VP12V: C46.1 C47.1 C50.1 C51.1 C52.1 FL1.2 U4.B3 U4.B4 U4.C4 U5.4 U5.5 U5.6 U5.21 U5.22 U5.23(VIN6) U5.25
VREF_SFP INTERFACE_SFP1: C121.1 U17.3(VREF)
XORL1: U34.6
XORL2: U34.4(XORL2)
N00638: U1.4
N01590: U1.7
N02344: U2.7
N02348: U2.6
N32209: U34.8
N32213: U34.2
N89867: IC2.25
N89871: IC2.4
N89889: IC2.3
N89893: IC2.48
N90109: IC2.19
N90113: IC2.17
N90529: IC2.11
N91101: IC2.59
N91105: IC2.58
N97786: J4.4
N97814: J4.5
N107878: IC2.39
N127138: U1.3
N140138: L7.1 U5.12 U5.13 U5.14 U5.15 U5.16
N146225: U8.1 U8.2(SNS) U8.19 U8.20
N146810: U8.4
N147711: U11.4
N149851: U6.4
N179430: IC2.51
N179442: IC2.50
N183488: U1.8
N183542: U1.9
N185131: U10.4
N185241: U10.1 U10.2(SNS) U10.19 U10.20
N202617: U34.16
N202639: U34.11
N202663: U34.14
N202677: U34.13
N224328: IC4.4 U17.16
N224332: IC4.5 U17.22
N224336: IC4.7 J7.2 R68.2 U18.1
N224340: IC4.6 J7.8 R69.2 U18.2
N224392: IC4.13
N224396: IC4.14
N224400: IC4.16
N224404: IC4.15
N224424: IC4.17
N224428: IC4.18
N224432: IC4.20
N224436: IC4.19
N224456: IC5.4
N224460: IC5.5
N224464: IC5.7
N224468: IC5.6
N224484: IC5.8
N224488: IC5.9
N224492: IC5.11
N224496: IC5.10
N252646: U17.19
N266416: IC4.11
N266420: IC4.10
N267255: IC4.8
N267259: IC4.9
N326883: IC2.15
N326887: IC2.14
N326891: IC2.2
N326895: IC2.1

Pads without a net: IC1 6; IC2 5 7 10 20 21 53 54 55 56; IC3 7; J4 2; J6 C2 C3 C6 C7 C8 C22 C23 D4 D5 D8 D9 D17 D18 D20 D21 D23 D24 D26 D27 D29 D30 D31 D33 D35 G6 G7 H1 H2; NOREF 1; NOREF#2 1; NOREF#3 1; NOREF#4 1; NOREF#5 1; NOREF#6 1; NOREF#7 1; NOREF#8 1; U2 4 5 8; U4 B1; U5 2 11 27 28 29 31; U6 5 6 7 9 10 11 12; U8 5 7 9 12; U10 5 7 9 12; U11 5 6 9 11 12; U16 13 16

## Routing (per net, layer and track width the routed paths; a pad name or vN(x,y) marks a point on that pad's centre or on a via; arc(x,y) is an arc through that point)
12V_CONN: length 10.9
  L3 w0.17: 19.99,12.57 J5.1 ; J5.1 18.31,13.5 ; J5.1 21.68,13.5 ; J5.1 19.99,14.43 ; S1.1 34.03,11.27 ; S1.1 35.45,9.86 ; S1.1 34.03,8.44 ; S1.1 32.61,9.86
12V_FUSE: length 8.3
  TOP w0.17: FL1.1 84.79,27.35 ; FL1.1 82.73,27.35 ; FL1.1 83.34,25.29 ; 63.25,3.43 F1.2 ; F1.2 62.32,4.6 ; F1.2 63.25,5.78 ; F1.2 64.18,4.6
12V_SW: length 9.9
  TOP w0.17: 37.21,9.86 S1.2 ; S1.2 38.63,8.44 ; S1.2 40.05,9.86 ; S1.2 38.63,11.27 ; F1.1 61.18,4.6 ; F1.1 60.25,5.78 ; F1.1 59.32,4.6 ; F1.1 60.25,3.43
GND_IN: length 14.6
  TOP w0.17: 24.69,8.81 J5.3 ; J5.3 25.63,10.5 ; J5.3 24.69,12.18 ; J5.3 23.76,10.5 ; J5.2 21.68,7.5 ; J5.2 19.99,6.57 ; J5.2 19.99,8.43 ; J5.2 18.31,7.5 ; 81.19,25.29 FL1.4 ; FL1.4 81.79,27.35 ; FL1.4 79.73,27.35
GND_POWER: length 64.8
  TOP w0.17: 84.61,36.99 C44.1 83.17,36.99 ; U4.B2 U4.C2 ; U4.C2 79.86,38.55 ; U4.C2 79.48,38.93 ; 78.26,38.55 U4.E2 ; U4.E2 78.64,38.93 ; U4.E2 78.26,39.31 ; 79.48,38.13 U4.C3 79.86,38.51 ; C46.2 81.35,33.28 ; C46.2 80.65,32.56 ; C46.2 81.35,31.84 ; 79.06,37.75 U4.D3 ; U4.D3 79.44,38.13 ; U4.D3 78.68,38.13 ; U4.D3 79.06,38.51 ; 56.61,51.14 C53.2 ; C53.2 56.61,53 ; C53.2 55.78,52.07 ; 75.04,33.92 C49.2 ; C49.2 75.87,34.85 ; C49.2 75.04,35.78 ; C49.2 74.21,34.85 ; C48.2 78.6,43.02 ; C48.2 79.43,42.09 ; C48.2 78.6,41.16 ; 78.68,39.73 U4.D1 ; U4.D1 79.06,39.35 ; U4.D1 79.06,40.11 ; 78.26,37.75 U4.E3 ; U4.E3 78.64,38.13 ; U4.E3 78.26,38.51 ; 56.61,45.66 C54.2 ; C54.2 56.61,47.51 ; C54.2 55.78,46.58 ; 77.26,55.91 C52.2 ; C52.2 77.98,56.61 ; C52.2 78.7,55.91 ; 78.26,36.95 U4.E4 ; U4.E4 78.26,37.71 ; U4.E4 78.64,37.33 ; 81.46,36.95 U4.A4 81.84,37.33 ; 80.56,51.48 U5.39 80.2,51.84 ; 80.2,47.48 U5.42 80.56,47.85 ; R32.2 82.5,49.82 ; R32.2 82.5,48.51 ; R32.2 81.85,49.16 ; R32.2 83.15,49.16 ; 85.22,49.77 R33.2 ; R33.2 85.88,49.12 ; R33.2 85.88,50.42 ; R33.2 86.53,49.77 ; R29.1 81.65,43.83 ; R29.1 80.77,44.55 ; R29.1 79.89,43.83 ; R29.1 80.77,43.1 ; 79.13,56.02 C50.2 ; C50.2 80.06,56.84 ; C50.2 80.99,56.02 ; 81.84,39.73 U4.A1 81.46,40.11 ; 79.73,29.1 FL1.3 ; FL1.3 81.19,31.15 ; FL1.3 81.79,29.1 ; C51.2 79.43,43.92 ; C51.2 78.71,43.21 ; C51.2 78.71,44.62 ; C51.2 78,43.92 ; U4.D2 79.06,39.31 ; U4.D2 78.68,38.93 ; U4.D2 79.06,38.55 ; U4.D2 79.44,38.93 ; U4.E1 78.26,40.11 ; U4.E1 78.26,39.35 ; U4.E1 78.64,39.73 ; 83.9,41.52 R30.2 ; R30.2 84.77,42.25 ; R30.2 83.9,42.98 ; R30.2 83.02,42.25 ; 74.57,51.84 U5.40 74.21,51.48 ; C47.2 78.61,35.85 ; C47.2 77.91,35.13 ; C47.2 78.61,34.41 ; 74.57,47.48 U5.41 74.21,47.85 ; 79.06,36.95 U4.D4 ; U4.D4 78.68,37.33 ; U4.D4 79.06,37.71
  L2 w0.17: J4.3 165.58,7.52 ; J4.3 164.64,8.46 ; J4.3 163.7,7.52 ; J4.3 164.64,6.58
  L5 w0.17: J4.3 165.58,7.52 ; J4.3 163.7,7.52 ; J4.3 164.64,8.46 ; J4.3 164.64,6.58
FB_3V5: length 5.8
  TOP w0.17: R33.1 85.19,51.27 85.18,51.28 C55.2 83.42,51.28 83.41,51.29 R31.2 81.97,50.91 U5.32
FB_5V5: length 3
  TOP w0.17: R30.1 83.76,40.35 82.63,39.22 81.75,39.22 U4.A2
RT_3V5: length 3.5
  TOP w0.17: R32.1 81.93,47.09 80.08,47.09 79.63,47.54 U5.26
RT_5V5: length 2.6
  TOP w0.17: U4.C1 80.77,40.64 R29.2
SS_5V5: length 2.7
  TOP w0.17: U4.A3 82.05,38.72 C44.2
VP3V5: length 14.2
  TOP w0.17: 61.95,49.45 L7.2 ; L7.2 63.33,47.43 ; L7.2 64.72,49.45 ; L7.2 63.33,51.48 ; R31.1 82.35,53.45 ; R31.1 81.69,52.79 ; R31.1 83,52.79 ; 58.61,51.14 C53.1 ; C53.1 59.44,52.07 ; C53.1 58.61,53 ; C54.1 59.44,46.58 ; C54.1 58.61,45.66 ; C54.1 58.61,47.51
VP5V5: length 16
  TOP w0.17: 76.28,37.33 U4.G4 ; U4.G4 76.66,37.71 ; U4.G4 76.66,36.95 ; U4.G4 77.04,37.33 ; 77.46,37.75 U4.F3 ; U4.F3 77.08,38.13 ; U4.F3 77.46,38.51 ; 77.46,36.95 U4.F4 ; U4.F4 77.46,37.71 ; U4.F4 77.08,37.33 ; 77.08,39.73 U4.F1 ; U4.F1 77.46,40.11 ; U4.F1 77.46,39.35 ; 77.46,38.55 U4.F2 ; U4.F2 77.08,38.93 ; U4.F2 77.46,39.31 ; 75.77,42.09 C48.1 ; C48.1 76.6,43.02 ; C48.1 76.6,41.16 ; 72.21,34.85 C49.1 ; C49.1 73.04,33.92 ; C49.1 73.04,35.78 ; U4.G2 76.66,39.31 ; U4.G2 76.28,38.93 ; U4.G2 76.66,38.55 ; U4.G2 77.04,38.93 ; U4.G1 77.04,39.73 ; U4.G1 76.28,39.73 ; U4.G1 76.66,39.35 ; U4.G1 76.66,40.11 ; U4.G3 76.66,38.51 ; U4.G3 76.28,38.13 ; U4.G3 77.04,38.13 ; U4.G3 76.66,37.75
VP12V: length 19.7
  TOP w0.17: U4.B4 80.83,37.33 81,37.5 81,37.96 80.83,38.13 U4.B3 ; U4.B4 80.66,36.95 ; U4.B4 80.28,37.33 ; C52.1 77.98,54.88 ; C52.1 77.98,53.47 ; C52.1 77.26,54.18 ; C52.1 78.7,54.18 ; C50.1 80.06,54.84 ; C50.1 80.06,53.19 ; C50.1 80.99,54.02 ; C50.1 79.13,54.02 ; FL1.2 84.79,29.1 ; FL1.2 83.34,31.15 ; FL1.2 82.73,29.1 ; C51.1 79.43,45.65 ; C51.1 78,45.65 ; C51.1 78.71,46.35 ; 79.86,36.95 U4.C4 80.24,37.33 ; 83.08,31.84 C46.1 ; C46.1 83.08,33.28 ; C46.1 83.79,32.56 ; C47.1 81.05,35.13 ; C47.1 80.34,35.85 ; C47.1 80.34,34.41
N140138: length 6.8
  TOP w0.17: L7.1 70.57,51.48 ; L7.1 71.96,49.45 ; L7.1 69.19,49.45 ; L7.1 70.57,47.43

## Copper pours and planes (outline as drawn; the poured copper is in the pictures)
12V_CONN on L3: 3,24.49 34.99,24.49 35.99,23.49 35.99,2.5 34.49,1 9,1 8,2 8,6.5 7,7.5 3,7.5 2,8.5 2,23.49
12V_FUSE on TOP: 82.48,27.99 95.48,27.99 96.48,26.99 96.48,2.5 94.98,1 62.48,1 61.98,1.5 61.98,7.39 61.98,7.39 61.98,12.88 62.59,13.49 73.33,13.49 73.74,13.08 73.74,8.36 74.07,8.03 74.07,8 81.48,8 82.48,9
12V_SW on TOP: 36.99,13.5 60.98,13.5 61.48,13 61.48,2 60.48,1 37.99,1 36.49,2.5 36.49,13
GND_IN on TOP: 3,27.99 81.98,27.99 81.98,15 81.48,14.5 31.49,14.5 30.49,13.5 30.49,2 29.49,1 9,1 8,2 8,6.5 7,7.5 3,7.5 2,8.5 2,26.99
GND_POWER on TOP: 49.5,63.68 83.16,63.68 83.82,63.02 83.82,55.4 83.67,55.24 77.42,55.24 76.83,54.66 76.83,51.03 76.89,50.98 78.41,50.98 78.49,51.05 79.68,51.05 79.76,50.98 79.76,50.6 81.58,50.6 81.64,50.55 81.64,50.29 81.71,50.22 83.06,50.22 83.26,50.42 83.26,51.46 83.08,51.64 81.84,51.64 81.76,51.56 81.76,51.28 81.66,51.18 79.98,51.18 79.93,51.23 79.93,52.15 87.66,52.15 87.88,51.92 87.88,47.19 87.73,47.04 83.34,47.04 83.34,48.18 83.16,48.36 81.92,48.36 81.79,48.23 81.79,47.37 81.74,47.32 80.14,47.32 79.91,47.55 79.91,48.16 79.71,48.36 76.83,48.36 76.81,48.34 76.81,47.37 76.68,47.24 76.68,44.96 76.94,44.7 85.6,44.7 85.6,36.32 81.03,36.32 81.03,37.59 82.55,37.59 82.55,37.62 84.76,37.62 84.84,37.69 84.84,41.25 84.79,41.3 82.78,41.3 82.68,41.2 82.68,39.73 82.35,39.4 81.03,39.4 81.03,40.36 81.79,41.12 81.79,42.7 81.71,42.77 79.58,42.77 79.48,42.67 79.48,40.18 79.55,40.18 79.5,40.13 79.5,39.62 79.76,39.37 80.01,39.37 80.26,39.12 80.26,38.1 79.76,37.59 79.5,37.59 79.5,36.83 79.25,36.58 79.25,33.99 81.48,33.99 81.98,33.49 81.98,28.49 74.98,28.49 73.98,29.49 73.98,33.49 74.12,33.63 74.12,33.63 74.12,35.94 74.19,36.02 77.83,36.02 77.98,36.17 77.98,40.36 77.77,40.56 77.77,43.97 70.92,43.97 70.38,43.43 70.38,32.38 70.79,31.98 73.1,31.98 73.46,31.62 73.46,29.08 72.92,28.55 50.06,28.55 48.74,29.87 48.74,62.92
GND_POWER on L2, L5: 2,2 228,2 228,113 2,113 ; 1 cut-out
VCC3V3 on L3: 91.98,107.47 226.44,107.47 227.94,105.97 227.94,47.49 220.94,40.49 220.94,16.5 101.97,16.5 99.97,18.5 99.97,55.99 24.49,55.99 22.99,57.49 22.99,66.98 24.49,68.48 87.98,68.48 90.98,71.48 90.98,106.47
Net_17 on L3: 3.5,53.99 19.99,53.99 21.49,52.49 21.49,37.99 22.99,36.49 68.48,36.49 68.48,39.99 69.98,41.49 76.98,41.49 77.98,40.49 77.98,25.99 76.98,24.99 3,24.99 2,25.99 2,52.49
Net_105 on L3: 19.5,54.99 4.5,54.99 2.5,56.99 2.5,83.48 6.5,87.48 86.98,87.48 88.48,85.98 88.48,71.98 85.98,69.48 22.99,69.48 20.99,67.48 20.99,56.49
VP3V5 on TOP: 81.53,53.75 85.06,53.75 85.14,53.67 85.14,52.3 85.09,52.25 79.91,52.25 79.86,52.2 79.86,51.23 79.78,51.16 79.48,51.16 79.4,51.23 79.4,51.92 79.3,52.02 78.99,52.02 78.94,52.07 78.94,52.83 79.04,52.93 81.2,52.93 81.43,53.16 81.43,53.64
VP3V5 on TOP: 66.24,56.24 58.19,56.24 57.73,55.78 57.73,43.28 58.06,42.95 65.71,42.95 66.55,43.79 66.55,55.93
VP3V5 on L3: 23.49,54.49 69.98,54.49 70,54.48 70.13,54.36 70.13,42.19 69.88,41.94 69.93,41.94 67.98,39.99 67.98,36.99 23.49,36.99 22.49,37.99 22.49,53.49
VP5V5 on TOP: 71.25,43.81 77.47,43.81 77.47,40.64 77.85,40.26 77.85,36.22 77.75,36.12 74.14,36.12 73.84,35.81 73.84,32.66 73.66,32.49 70.94,32.49 70.74,32.69 70.74,43.31
VP12V on TOP: 77.32,54.99 78.97,54.99 78.97,54.97 78.98,54.99 95.98,54.99 96.48,54.49 96.48,28.99 95.98,28.49 82.48,28.49 82.48,33.35 81.53,34.29 79.69,34.29 79.69,36.65 79.79,36.75 79.79,36.85 79.78,36.86 79.78,37.36 80.04,37.62 80.29,37.62 80.29,37.59 80.77,37.59 80.77,36.07 85.85,36.07 85.85,44.96 77.04,44.96 76.89,45.11 76.89,48.21 76.96,48.29 78.31,48.29 78.38,48.21 78.38,47.22 78.41,47.19 78.87,47.19 78.89,47.22 78.89,48.26 78.92,48.29 79.32,48.29 79.35,48.26 79.35,46.76 87.91,46.76 88.16,47.02 88.16,52.1 87.91,52.35 85.29,52.35 85.22,52.43 85.22,53.75 85.14,53.82 81.41,53.82 81.33,53.75 81.33,53.19 81.13,52.98 79.02,52.98 78.89,52.86 78.89,52.43 78.82,52.35 78.38,52.35 78.38,51.13 78.31,51.05 76.96,51.05 76.91,51.1 76.91,54.58
N140138 on TOP: 68.81,52.48 73.03,52.48 73.3,52.2 73.3,51.08 73.71,50.67 74.85,50.67 74.93,50.6 74.93,48.21 74.88,48.16 73.63,48.16 73.3,47.83 73.3,46.81 73,46.51 68.86,46.51 68.61,46.76 68.61,52.27

## Text on the board
User.Comments: Leave 2 mm from edge
DIMENSION: 115.0000 | 111.0000 | 11.9500 | 10.9000 | 8.9000 | 4.0000 | 76.7000 | 81.0000 | 82.0000 | 135.4000 | 139.7000 | 226.0000 | 230.0000 | 69.7000 | 70.3000
